# Altium PCB 1_ir-tara-f.PcbDoc (part 7 of 8)
Units mm, origin at the board's own origin, x right, y up, seen from the top; angles counter-clockwise.
Board outline 151 x 86.38 mm, 2 copper layers (Top Layer, Bottom Layer); 728 components, 20 nets, 2100 pads, 0 vias.
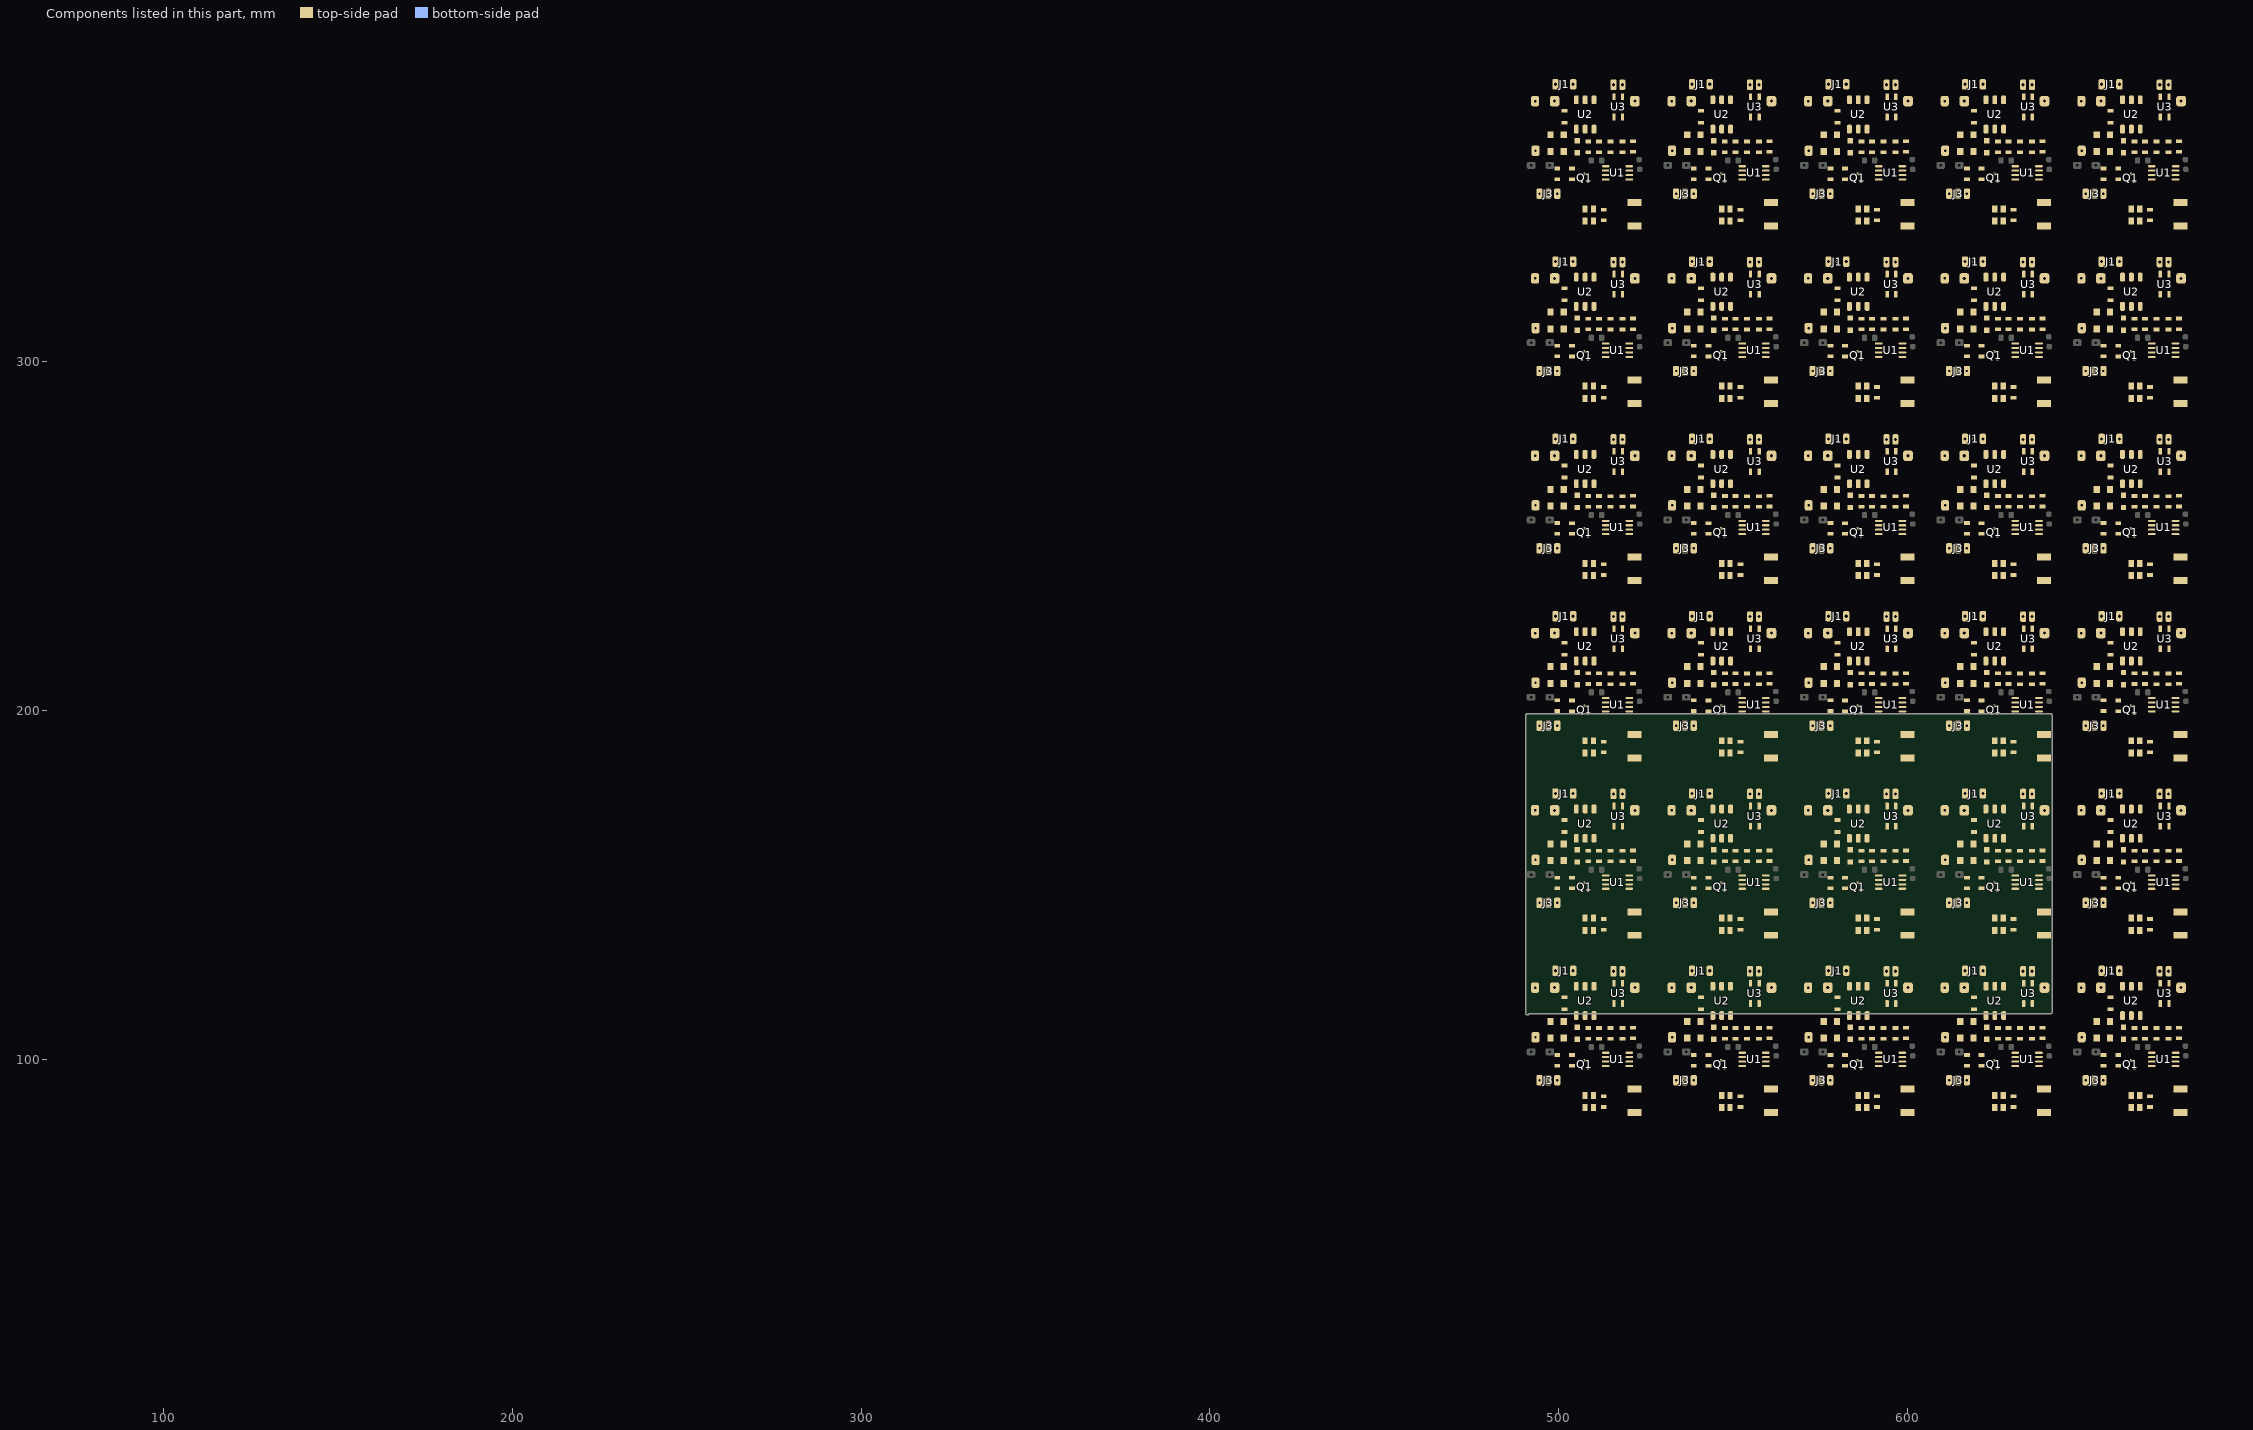
[diagram p7: the components of this part, seen from the top]

## Nets (pads, with @x,y where several pads share a name; then routed paths per layer and width w, separated by ;. In a path a pad name is that pad's centre, name@x,y a point inside that pad or via, vN(x,y) a via of type N, cw(c..) or ccw(c..) an arc to the next point about the centre after c; other vN are vias at no path point) (continued)
copper on no net: (continued)
  Top Layer w1: 492.094,102.173 491.844,102.173 491.344,101.673 491.344,101.099 491.332,101.087 491.332,82.234 492.475,81.091 496.793,81.091 ; 492.094,153.011 491.844,153.011 491.344,152.511 491.344,151.938 491.332,151.926 491.332,133.072 492.475,131.929 496.793,131.929 ; 492.094,203.85 491.844,203.85 491.344,203.35 491.344,202.776 491.332,202.764 491.332,183.911 492.475,182.768 496.793,182.768 ; 492.094,254.689 491.844,254.689 491.344,254.189 491.344,253.615 491.332,253.603 491.332,234.75 492.475,233.607 496.793,233.607 ; 492.094,305.527 491.844,305.527 491.344,305.027 491.344,304.453 491.332,304.441 491.332,285.588 492.475,284.445 496.793,284.445 ; 492.094,356.366 491.844,356.366 491.344,355.866 491.344,355.292 491.332,355.28 491.332,336.427 492.475,335.284 496.793,335.284 ; 494.103,106.146 495.523,106.146 ; 494.103,156.984 495.523,156.984 ; 494.103,207.823 495.523,207.823 ; 494.103,258.662 495.523,258.662 ; 494.103,309.5 495.523,309.5 ; 494.102,360.339 495.523,360.339 ; 494.507,94.299 494.507,96.585 495.523,97.601 495.523,106.146 ; 494.507,145.137 494.507,147.423 495.523,148.439 495.523,156.984 ; 494.507,195.976 494.507,198.262 495.523,199.278 495.523,207.823 ; 494.507,246.815 494.507,249.101 495.523,250.117 495.523,258.662 ; 494.507,297.653 494.507,299.939 495.523,300.955 495.523,309.5 ; 494.507,348.492 494.507,350.778 495.523,351.794 495.523,360.339 ; 497.047,94.045 497.047,81.345 496.793,81.091 ; 497.047,144.883 497.047,132.183 496.793,131.929 ; 497.047,195.722 497.047,183.022 496.793,182.768 ; 497.047,246.561 497.047,233.861 496.793,233.607 ; 497.047,297.399 497.047,284.699 496.793,284.445 ; 497.047,348.238 497.047,335.538 496.793,335.284 ; 497.682,110.946 497.682,113.222 498.825,114.365 501.619,114.365 ; 497.682,161.784 497.682,164.06 498.825,165.203 501.619,165.203 ; 497.682,212.623 497.682,214.899 498.825,216.042 501.619,216.042 ; 497.682,263.462 497.682,265.738 498.825,266.881 501.619,266.881 ; 497.682,314.3 497.682,316.576 498.825,317.719 501.619,317.719 ; 497.682,365.139 497.682,367.415 498.825,368.558 501.619,368.558 ; 498.679,124.92 499.079,125.32 499.079,125.414 ; 498.679,175.759 499.079,176.159 499.079,176.252 ; 498.679,226.597 499.079,226.997 499.079,227.091 ; 498.679,277.436 499.079,277.836 499.079,277.93 ; 498.679,328.274 499.079,328.674 499.079,328.768 ; 498.679,379.113 499.079,379.513 499.079,379.607 ; 498.825,114.492 498.825,120.567 498.846,120.588 ; 498.825,165.33 498.825,171.405 498.846,171.426 ; 498.825,216.169 498.825,222.244 498.846,222.265 ; 498.825,267.008 498.825,273.083 498.846,273.104 ; 498.825,317.846 498.825,323.921 498.846,323.942 ; 498.825,368.685 498.825,374.76 498.846,374.781 ; 499.552,103.605 499.552,101.302 499.577,101.277 499.587,101.277 ; 499.552,103.986 498.082,105.456 498.082,105.646 497.582,106.146 495.523,106.146 ; 499.552,154.444 499.552,152.14 499.577,152.115 499.587,152.115 ; 499.552,154.825 498.082,156.294 498.082,156.484 497.582,156.984 495.523,156.984 ; 499.552,205.282 499.552,202.979 499.577,202.954 499.587,202.954 ; 499.552,205.663 498.082,207.133 498.082,207.323 497.582,207.823 495.523,207.823 ; 499.552,256.121 499.552,253.818 499.577,253.793 499.587,253.793 ; 499.552,256.502 498.082,257.972 498.082,258.162 497.582,258.662 495.523,258.662 ; 499.552,306.959 499.552,304.656 499.577,304.631 499.587,304.631 ; 499.552,307.34 498.082,308.81 498.082,309 497.582,309.5 495.523,309.5 ; 499.552,357.798 499.552,355.495 499.577,355.47 499.587,355.47 ; 499.552,358.179 498.082,359.649 498.082,359.839 497.582,360.339 495.523,360.339 ; 501.982,110.319 503.044,109.257 504.671,109.257 504.794,109.257 ; 501.982,161.157 503.044,160.095 504.671,160.095 504.794,160.095 ; 501.982,211.996 503.044,210.934 504.671,210.934 504.794,210.934 ; 501.982,262.835 503.044,261.773 504.671,261.773 504.794,261.773 ; 501.982,313.673 503.044,312.611 504.671,312.611 504.794,312.611 ; 501.982,364.512 503.044,363.45 504.671,363.45 504.794,363.45 ; 504.921,109.257 504.794,109.257 ; 504.921,160.095 504.794,160.095 ; 504.921,210.934 504.794,210.934 ; 504.921,261.773 504.794,261.773 ; 504.921,312.611 504.794,312.611 ; 504.921,363.45 504.794,363.45 ; 505.519,105.974 507.842,105.974 ; 505.519,156.812 507.842,156.812 ; 505.519,207.651 507.842,207.651 ; 505.519,258.49 507.842,258.49 ; 505.519,309.328 507.842,309.328 ; 505.519,360.167 507.842,360.167 ; 507.461,86.292 509.908,86.292 ; 507.461,137.131 509.908,137.131 ; 507.461,187.969 509.908,187.969 ; 507.461,238.808 509.908,238.808 ; 507.461,289.646 509.908,289.646 ; 507.461,340.485 509.908,340.485 ; 507.588,112.569 507.588,109.023 ; 507.588,163.407 507.588,159.862 ; 507.588,214.246 507.588,210.701 ; 507.588,265.085 507.588,261.539 ; 507.588,315.923 507.588,312.378 ; 507.588,366.762 507.588,363.216 ; 507.969,105.974 507.978,105.983 511.398,105.983 ; 507.969,156.812 507.978,156.821 511.398,156.821 ; 507.969,207.651 507.978,207.66 511.398,207.66 ; 507.969,258.49 507.978,258.499 511.398,258.499 ; 507.969,309.328 507.978,309.337 511.398,309.337 ; 507.969,360.167 507.978,360.176 511.398,360.176 ; 510.094,86.292 512.829,86.292 ; 510.094,137.131 512.829,137.131 ; 510.094,187.969 512.829,187.969 ; 510.094,238.808 512.829,238.808 ; 510.094,289.646 512.829,289.646 ; 510.094,340.485 512.829,340.485 ; 510.755,109.023 508.477,109.023 507.588,109.023 ; 510.755,159.862 508.477,159.862 507.588,159.862 ; 510.755,210.701 508.477,210.701 507.588,210.701 ; 510.755,261.539 508.477,261.539 507.588,261.539 ; 510.755,312.378 508.477,312.378 507.588,312.378 ; 510.755,363.216 508.477,363.216 507.588,363.216 ; 512.922,89.435 513.247,89.435 515.317,91.505 521.685,91.505 525.876,91.505 ; 512.922,140.273 513.247,140.273 515.317,142.343 521.685,142.343 525.876,142.343 ; 512.922,191.112 513.247,191.112 515.317,193.182 521.685,193.182 525.876,193.182 ; 512.922,241.951 513.247,241.951 515.317,244.021 521.685,244.021 525.876,244.021 ; 512.922,292.789 513.247,292.789 515.317,294.859 521.685,294.859 525.876,294.859 ; 512.922,343.628 513.247,343.628 515.317,345.698 521.685,345.698 525.876,345.698 ; 521.304,109.094 523.526,109.094 525.876,106.745 525.876,103.951 ; 521.304,159.933 523.526,159.933 525.876,157.583 525.876,154.789 ; 521.304,210.772 523.526,210.772 525.876,208.422 525.876,205.628 ; 521.304,261.61 523.526,261.61 525.876,259.261 525.876,256.467 ; 521.304,312.449 523.526,312.449 525.876,310.099 525.876,307.305 ; 521.304,363.287 523.526,363.287 525.876,360.938 525.876,358.144 ; 523.082,103.824 525.749,103.824 525.876,103.951 ; 523.082,154.662 525.749,154.662 525.876,154.789 ; 523.082,205.501 525.749,205.501 525.876,205.628 ; 523.082,256.34 525.749,256.34 525.876,256.467 ; 523.082,307.178 525.749,307.178 525.876,307.305 ; 523.082,358.017 525.749,358.017 525.876,358.144 ; 531.248,102.173 530.998,102.173 530.498,101.673 530.498,101.099 530.486,101.087 530.486,82.234 531.629,81.091 535.947,81.091 ; 531.248,153.011 530.998,153.011 530.498,152.511 530.498,151.938 530.486,151.926 530.486,133.072 531.629,131.929 535.947,131.929 ; 531.248,203.85 530.998,203.85 530.498,203.35 530.498,202.776 530.486,202.764 530.486,183.911 531.629,182.768 535.947,182.768 ; 531.248,254.689 530.998,254.689 530.498,254.189 530.498,253.615 530.486,253.603 530.486,234.75 531.629,233.607 535.947,233.607 ; 531.248,305.527 530.998,305.527 530.498,305.027 530.498,304.453 530.486,304.441 530.486,285.588 531.629,284.445 535.947,284.445 ; 531.248,356.366 530.998,356.366 530.498,355.866 530.498,355.292 530.486,355.28 530.486,336.427 531.629,335.284 535.947,335.284 ; 533.257,106.146 534.677,106.146 ; 533.257,156.984 534.677,156.984 ; 533.257,207.823 534.677,207.823 ; 533.257,258.662 534.677,258.662 ; 533.257,309.5 534.677,309.5 ; 533.257,360.339 534.677,360.339 ; 533.661,94.299 533.661,96.585 534.677,97.601 534.677,106.146 ; 533.661,145.137 533.661,147.423 534.677,148.439 534.677,156.984 ; 533.661,195.976 533.661,198.262 534.677,199.278 534.677,207.823 ; 533.661,246.815 533.661,249.101 534.677,250.117 534.677,258.662 ; 533.661,297.653 533.661,299.939 534.677,300.955 534.677,309.5 ; 533.661,348.492 533.661,350.778 534.677,351.794 534.677,360.339 ; 536.201,94.045 536.201,81.345 535.947,81.091 ; 536.201,144.883 536.201,132.183 535.947,131.929 ; 536.201,195.722 536.201,183.022 535.947,182.768 ; 536.201,246.561 536.201,233.861 535.947,233.607 ; 536.201,297.399 536.201,284.699 535.947,284.445 ; 536.201,348.238 536.201,335.538 535.947,335.284 ; 536.836,110.946 536.836,113.222 537.979,114.365 540.773,114.365 ; 536.836,161.784 536.836,164.06 537.979,165.203 540.773,165.203 ; 536.836,212.623 536.836,214.899 537.979,216.042 540.773,216.042 ; 536.836,263.462 536.836,265.738 537.979,266.881 540.773,266.881 ; 536.836,314.3 536.836,316.576 537.979,317.719 540.773,317.719 ; 536.836,365.139 536.836,367.415 537.979,368.558 540.773,368.558 ; 537.833,124.92 538.233,125.32 538.233,125.414 ; 537.833,175.759 538.233,176.159 538.233,176.252 ; 537.833,226.597 538.233,226.997 538.233,227.091 ; 537.833,277.436 538.233,277.836 538.233,277.93 ; 537.833,328.274 538.233,328.674 538.233,328.768 ; 537.833,379.113 538.233,379.513 538.233,379.607 ; 537.979,114.492 537.979,120.567 538,120.588 ; 537.979,165.33 537.979,171.405 538,171.426 ; 537.979,216.169 537.979,222.244 538,222.265 ; 537.979,267.008 537.979,273.083 538,273.104 ; 537.979,317.846 537.979,323.921 538,323.942 ; 537.979,368.685 537.979,374.76 538,374.781 ; 538.706,103.605 538.706,101.302 538.731,101.277 538.741,101.277 ; 538.706,103.986 537.236,105.456 537.236,105.646 536.736,106.146 534.677,106.146 ; 538.706,154.444 538.706,152.14 538.731,152.115 538.741,152.115 ; 538.706,154.825 537.236,156.294 537.236,156.484 536.736,156.984 534.677,156.984 ; 538.706,205.282 538.706,202.979 538.731,202.954 538.741,202.954 ; 538.706,205.663 537.236,207.133 537.236,207.323 536.736,207.823 534.677,207.823 ; 538.706,256.121 538.706,253.818 538.731,253.793 538.741,253.793 ; 538.706,256.502 537.236,257.972 537.236,258.162 536.736,258.662 534.677,258.662 ; 538.706,306.959 538.706,304.656 538.731,304.631 538.741,304.631 ; 538.706,307.34 537.236,308.81 537.236,309 536.736,309.5 534.677,309.5 ; 538.706,357.798 538.706,355.495 538.731,355.47 538.741,355.47 ; 538.706,358.179 537.236,359.649 537.236,359.839 536.736,360.339 534.677,360.339 ; 541.136,110.319 542.198,109.257 543.825,109.257 543.948,109.257 ; 541.136,161.157 542.198,160.095 543.825,160.095 543.948,160.095 ; 541.136,211.996 542.198,210.934 543.825,210.934 543.948,210.934 ; 541.136,262.835 542.198,261.773 543.825,261.773 543.948,261.773 ; 541.136,313.673 542.198,312.611 543.825,312.611 543.948,312.611 ; 541.136,364.512 542.198,363.45 543.825,363.45 543.948,363.45 ; 544.075,109.257 543.948,109.257 ; 544.075,160.095 543.948,160.095 ; 544.075,210.934 543.948,210.934 ; 544.075,261.773 543.948,261.773 ; 544.075,312.611 543.948,312.611 ; 544.075,363.45 543.948,363.45 ; 544.673,105.974 546.996,105.974 ; 544.673,156.812 546.996,156.812 ; 544.673,207.651 546.996,207.651 ; 544.673,258.49 546.996,258.49 ; 544.673,309.328 546.996,309.328 ; 544.673,360.167 546.996,360.167 ; 546.615,86.292 549.062,86.292 ; 546.615,137.131 549.062,137.131 ; 546.615,187.969 549.062,187.969 ; 546.615,238.808 549.062,238.808 ; 546.615,289.646 549.062,289.646 ; 546.615,340.485 549.062,340.485 ; 546.742,112.569 546.742,109.023 ; 546.742,163.407 546.742,159.862 ; 546.742,214.246 546.742,210.701 ; 546.742,265.085 546.742,261.539 ; 546.742,315.923 546.742,312.378 ; 546.742,366.762 546.742,363.216 ; 547.123,105.974 547.133,105.983 550.552,105.983 ; 547.123,156.812 547.133,156.821 550.552,156.821 ; 547.123,207.651 547.133,207.66 550.552,207.66 ; 547.123,258.49 547.133,258.499 550.552,258.499 ; 547.123,309.328 547.133,309.337 550.552,309.337 ; 547.123,360.167 547.133,360.176 550.552,360.176 ; 549.249,86.292 551.983,86.292 ; 549.249,137.131 551.983,137.131 ; 549.249,187.969 551.983,187.969 ; 549.249,238.808 551.983,238.808 ; 549.249,289.646 551.983,289.646 ; 549.249,340.485 551.983,340.485 ; 549.91,109.023 547.631,109.023 546.742,109.023 ; 549.91,159.862 547.631,159.862 546.742,159.862 ; 549.91,210.701 547.631,210.701 546.742,210.701 ; 549.91,261.539 547.631,261.539 546.742,261.539 ; 549.91,312.378 547.631,312.378 546.742,312.378 ; 549.91,363.216 547.631,363.216 546.742,363.216 ; 552.076,89.435 552.401,89.435 554.471,91.505 560.839,91.505 565.03,91.505 ; 552.076,140.273 552.401,140.273 554.471,142.343 560.839,142.343 565.03,142.343 ; 552.076,191.112 552.401,191.112 554.471,193.182 560.839,193.182 565.03,193.182 ; 552.076,241.951 552.401,241.951 554.471,244.021 560.839,244.021 565.03,244.021 ; 552.076,292.789 552.401,292.789 554.471,294.859 560.839,294.859 565.03,294.859 ; 552.076,343.628 552.401,343.628 554.471,345.698 560.839,345.698 565.03,345.698 ; 560.458,109.094 562.681,109.094 565.03,106.745 565.03,103.951 ; 560.458,159.933 562.681,159.933 565.03,157.583 565.03,154.789 ; 560.458,210.772 562.681,210.772 565.03,208.422 565.03,205.628 ; 560.458,261.61 562.681,261.61 565.03,259.261 565.03,256.467 ; 560.458,312.449 562.681,312.449 565.03,310.099 565.03,307.305 ; 560.458,363.287 562.681,363.287 565.03,360.938 565.03,358.144 ; 562.236,103.824 564.903,103.824 565.03,103.951 ; 562.236,154.662 564.903,154.662 565.03,154.789 ; 562.236,205.501 564.903,205.501 565.03,205.628 ; 562.236,256.34 564.903,256.34 565.03,256.467 ; 562.236,307.178 564.903,307.178 565.03,307.305 ; 562.236,358.017 564.903,358.017 565.03,358.144 ; 570.403,102.173 570.153,102.173 569.653,101.673 569.653,101.099 569.641,101.087 569.641,82.234 570.784,81.091 575.102,81.091 ; 570.403,203.85 570.153,203.85 569.653,203.35 569.653,202.776 569.641,202.764 569.641,183.911 570.784,182.768 575.102,182.768 ; 570.403,254.689 570.153,254.689 569.653,254.189 569.653,253.615 569.641,253.603 569.641,234.75 570.784,233.607 575.102,233.607 ; 570.403,305.527 570.153,305.527 569.653,305.027 569.653,304.453 569.641,304.441 569.641,285.588 570.784,284.445 575.102,284.445 ; 570.403,356.366 570.153,356.366 569.653,355.866 569.653,355.292 569.641,355.28 569.641,336.427 570.784,335.284 575.102,335.284 ; 572.412,106.146 573.832,106.146 ; 572.412,207.823 573.832,207.823 ; 572.412,258.662 573.832,258.662 ; 572.412,309.5 573.832,309.5 ; 572.412,360.339 573.832,360.339 ; 572.816,94.299 572.816,96.585 573.832,97.601 573.832,106.146 ; 572.816,195.976 572.816,198.262 573.832,199.278 573.832,207.823 ; 572.816,246.815 572.816,249.101 573.832,250.117 573.832,258.662 ; 572.816,297.653 572.816,299.939 573.832,300.955 573.832,309.5 ; 572.816,348.492 572.816,350.778 573.832,351.794 573.832,360.339 ; 575.356,94.045 575.356,81.345 575.102,81.091 ; 575.356,195.722 575.356,183.022 575.102,182.768 ; 575.356,246.561 575.356,233.861 575.102,233.607 ; 575.356,297.399 575.356,284.699 575.102,284.445 ; 575.356,348.238 575.356,335.538 575.102,335.284 ; 575.991,110.946 575.991,113.222 577.134,114.365 579.928,114.365 ; 575.991,212.623 575.991,214.899 577.134,216.042 579.928,216.042 ; 575.991,263.462 575.991,265.738 577.134,266.881 579.928,266.881 ; 575.991,314.3 575.991,316.576 577.134,317.719 579.928,317.719 ; 575.991,365.139 575.991,367.415 577.134,368.558 579.928,368.558 ; 576.988,124.92 577.388,125.32 577.388,125.414 ; 576.988,226.597 577.388,226.997 577.388,227.091 ; 576.988,277.436 577.388,277.836 577.388,277.93 ; 576.988,328.274 577.388,328.674 577.388,328.768 ; 576.988,379.113 577.388,379.513 577.388,379.607 ; 577.134,114.492 577.134,120.567 577.155,120.588 ; 577.134,216.169 577.134,222.244 577.155,222.265 ; 577.134,267.008 577.134,273.083 577.155,273.104 ; 577.134,317.846 577.134,323.921 577.155,323.942 ; 577.134,368.685 577.134,374.76 577.155,374.781 ; 577.861,103.605 577.861,101.302 577.886,101.277 577.896,101.277 ; 577.861,103.986 576.391,105.456 576.391,105.646 575.891,106.146 573.832,106.146 ; 577.861,205.282 577.861,202.979 577.886,202.954 577.896,202.954 ; 577.861,205.663 576.391,207.133 576.391,207.323 575.891,207.823 573.832,207.823 ; 577.861,256.121 577.861,253.818 577.886,253.793 577.896,253.793 ; 577.861,256.502 576.391,257.972 576.391,258.162 575.891,258.662 573.832,258.662 ; 577.861,306.959 577.861,304.656 577.886,304.631 577.896,304.631 ; 577.861,307.34 576.391,308.81 576.391,309 575.891,309.5 573.832,309.5 ; 577.861,357.798 577.861,355.495 577.886,355.47 577.896,355.47 ; 577.861,358.179 576.391,359.649 576.391,359.839 575.891,360.339 573.832,360.339 ; 580.291,110.319 581.353,109.257 582.98,109.257 583.103,109.257 ; 580.291,211.996 581.353,210.934 582.98,210.934 583.103,210.934 ; 580.291,262.835 581.353,261.773 582.98,261.773 583.103,261.773 ; 580.291,313.673 581.353,312.611 582.98,312.611 583.103,312.611 ; 580.291,364.512 581.353,363.45 582.98,363.45 583.103,363.45 ; 583.23,109.257 583.103,109.257 ; 583.23,210.934 583.103,210.934 ; 583.23,261.773 583.103,261.773 ; 583.23,312.611 583.103,312.611 ; 583.23,363.45 583.103,363.45 ; 583.828,105.974 586.151,105.974 ; 583.828,207.651 586.151,207.651 ; 583.828,258.49 586.151,258.49 ; 583.828,309.328 586.151,309.328 ; 583.828,360.167 586.151,360.167 ; 585.77,86.292 588.217,86.292 ; 585.77,187.969 588.217,187.969 ; 585.77,238.808 588.217,238.808 ; 585.77,289.646 588.217,289.646 ; 585.77,340.485 588.217,340.485 ; 585.897,112.569 585.897,109.023 ; 585.897,214.246 585.897,210.701 ; 585.897,265.085 585.897,261.539 ; 585.897,315.923 585.897,312.378 ; 585.897,366.762 585.897,363.216 ; 586.278,105.974 586.287,105.983 589.707,105.983 ; 586.278,207.651 586.287,207.66 589.707,207.66 ; 586.278,258.49 586.287,258.499 589.707,258.499 ; 586.278,309.328 586.287,309.337 589.707,309.337 ; 586.278,360.167 586.287,360.176 589.707,360.176 ; 588.403,86.292 591.138,86.292 ; 588.403,187.969 591.138,187.969 ; 588.403,238.808 591.138,238.808 ; 588.403,289.646 591.138,289.646 ; 588.403,340.485 591.138,340.485 ; 589.064,109.023 586.786,109.023 585.897,109.023 ; 589.064,210.701 586.786,210.701 585.897,210.701 ; 589.064,261.539 586.786,261.539 585.897,261.539 ; 589.064,312.378 586.786,312.378 585.897,312.378 ; 589.064,363.216 586.786,363.216 585.897,363.216 ; 591.231,89.435 591.556,89.435 593.626,91.505 599.994,91.505 604.185,91.505 ; 591.231,191.112 591.556,191.112 593.626,193.182 599.994,193.182 604.185,193.182 ; 591.231,241.951 591.556,241.951 593.626,244.021 599.994,244.021 604.185,244.021 ; 591.231,292.789 591.556,292.789 593.626,294.859 599.994,294.859 604.185,294.859 ; 591.231,343.628 591.556,343.628 593.626,345.698 599.994,345.698 604.185,345.698 ; 599.613,109.094 601.835,109.094 604.185,106.745 604.185,103.951 ; 599.613,210.772 601.835,210.772 604.185,208.422 604.185,205.628 ; 599.613,261.61 601.835,261.61 604.185,259.261 604.185,256.467 ; 599.613,312.449 601.835,312.449 604.185,310.099 604.185,307.305 ; 599.613,363.287 601.835,363.287 604.185,360.938 604.185,358.144 ; 601.391,103.824 604.058,103.824 604.185,103.951 ; 601.391,205.501 604.058,205.501 604.185,205.628 ; 601.391,256.34 604.058,256.34 604.185,256.467 ; 601.391,307.178 604.058,307.178 604.185,307.305 ; 601.391,358.017 604.058,358.017 604.185,358.144 ; 609.558,102.173 609.308,102.173 608.808,101.673 608.808,101.099 608.796,101.087 608.796,82.234 609.939,81.091 614.257,81.091 ; 609.558,153.011 609.308,153.011 608.808,152.511 608.808,151.938 608.796,151.926 608.796,133.072 609.939,131.929 614.257,131.929 ; 609.558,203.85 609.308,203.85 608.808,203.35 608.808,202.776 608.796,202.764 608.796,183.911 609.939,182.768 614.257,182.768 ; 609.558,254.689 609.308,254.689 608.808,254.189 608.808,253.615 608.796,253.603 608.796,234.75 609.939,233.607 614.257,233.607 ; 609.558,305.527 609.308,305.527 608.808,305.027 608.808,304.453 608.796,304.441 608.796,285.588 609.939,284.445 614.257,284.445 ; 609.558,356.366 609.308,356.366 608.808,355.866 608.808,355.292 608.796,355.28 608.796,336.427 609.939,335.284 614.257,335.284 ; 611.566,106.146 612.987,106.146 ; 611.566,156.984 612.987,156.984 ; 611.566,207.823 612.987,207.823 ; 611.566,258.662 612.987,258.662 ; 611.566,309.5 612.987,309.5 ; 611.566,360.339 612.987,360.339 ; 611.971,94.299 611.971,96.585 612.987,97.601 612.987,106.146 ; 611.971,145.137 611.971,147.423 612.987,148.439 612.987,156.984 ; 611.971,195.976 611.971,198.262 612.987,199.278 612.987,207.823 ; 611.971,246.815 611.971,249.101 612.987,250.117 612.987,258.662 ; 611.971,297.653 611.971,299.939 612.987,300.955 612.987,309.5 ; 611.971,348.492 611.971,350.778 612.987,351.794 612.987,360.339 ; 614.511,94.045 614.511,81.345 614.257,81.091 ; 614.511,144.883 614.511,132.183 614.257,131.929 ; 614.511,195.722 614.511,183.022 614.257,182.768 ; 614.511,246.561 614.511,233.861 614.257,233.607 ; 614.511,297.399 614.511,284.699 614.257,284.445 ; 614.511,348.238 614.511,335.538 614.257,335.284 ; 615.146,110.946 615.146,113.222 616.289,114.365 619.083,114.365 ; 615.146,161.784 615.146,164.06 616.289,165.203 619.083,165.203 ; 615.146,212.623 615.146,214.899 616.289,216.042 619.083,216.042 ; 615.146,263.462 615.146,265.738 616.289,266.881 619.083,266.881 ; 615.146,314.3 615.146,316.576 616.289,317.719 619.083,317.719 ; 615.146,365.139 615.146,367.415 616.289,368.558 619.083,368.558 ; 616.143,124.92 616.543,125.32 616.543,125.414 ; 616.143,175.759 616.543,176.159 616.543,176.252 ; 616.143,226.597 616.543,226.997 616.543,227.091 ; 616.143,277.436 616.543,277.836 616.543,277.93 ; 616.143,328.274 616.543,328.674 616.543,328.768 ; 616.143,379.113 616.543,379.513 616.543,379.607 ; 616.289,114.492 616.289,120.567 616.31,120.588 ; 616.289,165.33 616.289,171.405 616.31,171.426 ; 616.289,216.169 616.289,222.244 616.31,222.265 ; 616.289,267.008 616.289,273.083 616.31,273.104 ; 616.289,317.846 616.289,323.921 616.31,323.942 ; 616.289,368.685 616.289,374.76 616.31,374.781 ; 617.016,103.605 617.016,101.302 617.041,101.277 617.051,101.277 ; 617.016,103.986 615.546,105.456 615.546,105.646 615.046,106.146 612.987,106.146 ; 617.015,154.444 617.015,152.14 617.04,152.115 617.051,152.115 ; 617.015,154.825 615.546,156.294 615.546,156.484 615.046,156.984 612.987,156.984 ; 617.015,205.282 617.015,202.979 617.04,202.954 617.051,202.954 ; 617.015,205.663 615.546,207.133 615.546,207.323 615.046,207.823 612.987,207.823 ; 617.015,256.121 617.015,253.818 617.04,253.793 617.051,253.793 ; 617.015,256.502 615.546,257.972 615.546,258.162 615.046,258.662 612.987,258.662 ; 617.015,306.959 617.015,304.656 617.04,304.631 617.051,304.631 ; 617.015,307.34 615.546,308.81 615.546,309 615.046,309.5 612.987,309.5 ; 617.015,357.798 617.015,355.495 617.04,355.47 617.051,355.47 ; 617.015,358.179 615.546,359.649 615.546,359.839 615.046,360.339 612.987,360.339 ; 619.446,364.512 620.508,363.45 622.135,363.45 622.258,363.45 ; 619.446,110.319 620.508,109.257 622.135,109.257 622.258,109.257 ; 619.446,161.157 620.508,160.095 622.135,160.095 622.258,160.095 ; 619.446,211.996 620.508,210.934 622.135,210.934 622.258,210.934 ; 619.446,262.835 620.508,261.773 622.135,261.773 622.258,261.773 ; 619.446,313.673 620.508,312.611 622.135,312.611 622.258,312.611 ; 622.385,109.257 622.258,109.257 ; 622.385,160.095 622.258,160.095 ; 622.385,210.934 622.258,210.934 ; 622.385,261.773 622.258,261.773 ; 622.385,312.611 622.258,312.611 ; 622.385,363.45 622.258,363.45 ; 622.983,105.974 625.306,105.974 ; 622.983,156.812 625.306,156.812 ; 622.983,207.651 625.306,207.651 ; 622.983,258.49 625.306,258.49 ; 622.983,309.328 625.306,309.328 ; 622.983,360.167 625.306,360.167 ; 624.925,86.292 627.372,86.292 ; 624.925,137.131 627.372,137.131 ; 624.925,187.969 627.372,187.969 ; 624.925,238.808 627.372,238.808 ; 624.925,289.646 627.372,289.646 ; 624.925,340.485 627.372,340.485 ; 625.052,112.569 625.052,109.023 ; 625.052,163.407 625.052,159.862 ; 625.052,214.246 625.052,210.701 ; 625.052,265.085 625.052,261.539 ; 625.052,315.923 625.052,312.378 ; 625.052,366.762 625.052,363.216 ; 625.433,105.974 625.442,105.983 628.862,105.983 ; 625.433,156.812 625.442,156.821 628.862,156.821 ; 625.433,207.651 625.442,207.66 628.862,207.66 ; 625.433,258.49 625.442,258.499 628.862,258.499 ; 625.433,309.328 625.442,309.337 628.862,309.337 ; 625.433,360.167 625.442,360.176 628.862,360.176 ; 627.558,86.292 630.293,86.292 ; 627.558,137.131 630.293,137.131 ; 627.558,187.969 630.293,187.969 ; 627.558,238.808 630.293,238.808 ; 627.558,289.646 630.293,289.646 ; 627.558,340.485 630.293,340.485 ; 628.219,109.023 625.941,109.023 625.052,109.023 ; 628.219,159.862 625.941,159.862 625.052,159.862 ; 628.219,210.701 625.941,210.701 625.052,210.701 ; 628.219,261.539 625.941,261.539 625.052,261.539 ; 628.219,312.378 625.941,312.378 625.052,312.378 ; 628.219,363.216 625.941,363.216 625.052,363.216 ; 630.386,89.435 630.711,89.435 632.781,91.505 639.149,91.505 643.34,91.505 ; 630.386,140.273 630.711,140.273 632.781,142.343 639.149,142.343 643.34,142.343 ; 630.386,191.112 630.711,191.112 632.781,193.182 639.149,193.182 643.34,193.182 ; 630.386,241.951 630.711,241.951 632.781,244.021 639.149,244.021 643.34,244.021 ; 630.386,292.789 630.711,292.789 632.781,294.859 639.149,294.859 643.34,294.859 ; 630.386,343.628 630.711,343.628 632.781,345.698 639.149,345.698 643.34,345.698 ; 638.768,109.094 640.99,109.094 643.34,106.745 643.34,103.951 ; 638.768,159.933 640.99,159.933 643.34,157.583 643.34,154.789 ; 638.768,210.772 640.99,210.772 643.34,208.422 643.34,205.628 ; 638.768,261.61 640.99,261.61 643.34,259.261 643.34,256.467 ; 638.768,312.449 640.99,312.449 643.34,310.099 643.34,307.305 ; 638.768,363.287 640.99,363.287 643.34,360.938 643.34,358.144 ; 640.546,103.824 643.213,103.824 643.34,103.951 ; 640.546,154.662 643.213,154.662 643.34,154.789 ; 640.546,205.501 643.213,205.501 643.34,205.628 ; 640.546,256.34 643.213,256.34 643.34,256.467 ; 640.546,307.178 643.213,307.178 643.34,307.305 ; 640.546,358.017 643.213,358.017 643.34,358.144 ; 648.712,102.173 648.462,102.173 647.962,101.673 647.962,101.099 647.95,101.087 647.95,82.234 649.093,81.091 653.411,81.091 ; 648.712,153.011 648.462,153.011 647.962,152.511 647.962,151.938 647.95,151.926 647.95,133.072 649.093,131.929 653.411,131.929 ; 648.712,203.85 648.462,203.85 647.962,203.35 647.962,202.776 647.95,202.764 647.95,183.911 649.093,182.768 653.411,182.768 ; 648.712,254.689 648.462,254.689 647.962,254.189 647.962,253.615 647.95,253.603 647.95,234.75 649.093,233.607 653.411,233.607 ; 648.712,305.527 648.462,305.527 647.962,305.027 647.962,304.453 647.95,304.441 647.95,285.588 649.093,284.445 653.411,284.445 ; 648.712,356.366 648.462,356.366 647.962,355.866 647.962,355.292 647.95,355.28 647.95,336.427 649.093,335.284 653.411,335.284 ; 650.721,106.146 652.141,106.146 ; 650.721,156.984 652.141,156.984 ; 650.721,207.823 652.141,207.823 ; 650.721,258.662 652.141,258.662 ; 650.721,309.5 652.141,309.5 ; 650.721,360.339 652.141,360.339 ; 651.125,94.299 651.125,96.585 652.141,97.601 652.141,106.146 ; 651.125,145.137 651.125,147.423 652.141,148.439 652.141,156.984 ; 651.125,195.976 651.125,198.262 652.141,199.278 652.141,207.823 ; 651.125,246.815 651.125,249.101 652.141,250.117 652.141,258.662 ; 651.125,297.653 651.125,299.939 652.141,300.955 652.141,309.5 ; 651.125,348.492 651.125,350.778 652.141,351.794 652.141,360.339 ; 653.665,94.045 653.665,81.345 653.411,81.091 ; 653.665,144.883 653.665,132.183 653.411,131.929 ; 653.665,195.722 653.665,183.022 653.411,182.768 ; 653.665,246.561 653.665,233.861 653.411,233.607 ; 653.665,297.399 653.665,284.699 653.411,284.445 ; 653.665,348.238 653.665,335.538 653.411,335.284 ; 654.3,110.946 654.3,113.222 655.443,114.365 658.237,114.365 ; 654.3,161.784 654.3,164.06 655.443,165.203 658.237,165.203 ; 654.3,212.623 654.3,214.899 655.443,216.042 658.237,216.042 ; 654.3,263.462 654.3,265.738 655.443,266.881 658.237,266.881 ; 654.3,314.3 654.3,316.576 655.443,317.719 658.237,317.719 ; 654.3,365.139 654.3,367.415 655.443,368.558 658.237,368.558 ; 655.297,124.92 655.697,125.32 655.697,125.414 ; 655.297,175.759 655.697,176.159 655.697,176.252 ; 655.297,226.597 655.697,226.997 655.697,227.091 ; 655.297,277.436 655.697,277.836 655.697,277.93 ; 655.297,328.274 655.697,328.674 655.697,328.768 ; 655.297,379.113 655.697,379.513 655.697,379.607 ; 655.443,114.492 655.443,120.567 655.464,120.588 ; 655.443,165.33 655.443,171.405 655.464,171.426 ; 655.443,216.169 655.443,222.244 655.464,222.265 ; 655.443,267.008 655.443,273.083 655.464,273.104 ; 655.443,317.846 655.443,323.921 655.464,323.942 ; 655.443,368.685 655.443,374.76 655.464,374.781 ; 656.17,103.605 656.17,101.302 656.195,101.277 656.205,101.277 ; 656.17,103.986 654.7,105.456 654.7,105.646 654.2,106.146 652.141,106.146 ; 656.17,154.444 656.17,152.14 656.195,152.115 656.205,152.115 ; 656.17,154.825 654.7,156.294 654.7,156.484 654.2,156.984 652.141,156.984 ; 656.17,205.282 656.17,202.979 656.195,202.954 656.205,202.954 ; 656.17,205.663 654.7,207.133 654.7,207.323 654.2,207.823 652.141,207.823 ; 656.17,256.121 656.17,253.818 656.195,253.793 656.205,253.793 ; 656.17,256.502 654.7,257.972 654.7,258.162 654.2,258.662 652.141,258.662 ; 656.17,306.959 656.17,304.656 656.195,304.631 656.205,304.631 ; 656.17,307.34 654.7,308.81 654.7,309 654.2,309.5 652.141,309.5 ; 656.17,357.798 656.17,355.495 656.195,355.47 656.205,355.47 ; 656.17,358.179 654.7,359.649 654.7,359.839 654.2,360.339 652.141,360.339 ; 658.6,110.319 659.662,109.257 661.289,109.257 661.412,109.257 ; 658.6,161.157 659.662,160.095 661.289,160.095 661.412,160.095 ; 658.6,211.996 659.662,210.934 661.289,210.934 661.412,210.934 ; 658.6,262.835 659.662,261.773 661.289,261.773 661.412,261.773 ; 658.6,313.673 659.662,312.611 661.289,312.611 661.412,312.611 ; 658.6,364.512 659.662,363.45 661.289,363.45 661.412,363.45 ; 661.539,109.257 661.412,109.257 ; 661.539,160.095 661.412,160.095 ; 661.539,210.934 661.412,210.934 ; 661.539,261.773 661.412,261.773 ; 661.539,312.611 661.412,312.611 ; 661.539,363.45 661.412,363.45 ; 662.137,105.974 664.46,105.974 ; 662.137,156.812 664.46,156.812 ; 662.137,207.651 664.46,207.651 ; 662.137,258.49 664.46,258.49 ; 662.137,309.328 664.46,309.328 ; 662.137,360.167 664.46,360.167 ; 664.079,86.292 666.526,86.292 ; 664.079,137.131 666.526,137.131 ; 664.079,187.969 666.526,187.969 ; 664.079,238.808 666.526,238.808 ; 664.079,289.646 666.526,289.646 ; 664.079,340.485 666.526,340.485 ; 664.206,112.569 664.206,109.023 ; 664.206,163.407 664.206,159.862 ; 664.206,214.246 664.206,210.701 ; 664.206,265.085 664.206,261.539 ; 664.206,315.923 664.206,312.378 ; 664.206,366.762 664.206,363.216 ; 664.587,105.974 664.596,105.983 668.016,105.983 ; 664.587,156.812 664.596,156.821 668.016,156.821 ; 664.587,207.651 664.596,207.66 668.016,207.66 ; 664.587,258.49 664.596,258.499 668.016,258.499 ; 664.587,309.328 664.596,309.337 668.016,309.337 ; 664.587,360.167 664.596,360.176 668.016,360.176 ; 666.712,86.292 669.447,86.292 ; 666.712,137.131 669.447,137.131 ; 666.712,187.969 669.447,187.969 ; 666.712,238.808 669.447,238.808 ; 666.712,289.646 669.447,289.646 ; 666.712,340.485 669.447,340.485 ; 667.374,109.023 665.095,109.023 664.206,109.023 ; 667.374,159.862 665.095,159.862 664.206,159.862 ; 667.374,210.701 665.095,210.701 664.206,210.701 ; 667.374,261.539 665.095,261.539 664.206,261.539 ; 667.374,312.378 665.095,312.378 664.206,312.378 ; 667.374,363.216 665.095,363.216 664.206,363.216 ; 669.54,89.435 669.865,89.435 671.935,91.505 678.303,91.505 682.494,91.505 ; 669.54,140.273 669.865,140.273 671.935,142.343 678.303,142.343 682.494,142.343 ; 669.54,191.112 669.865,191.112 671.935,193.182 678.303,193.182 682.494,193.182 ; 669.54,241.951 669.865,241.951 671.935,244.021 678.303,244.021 682.494,244.021 ; 669.54,292.789 669.865,292.789 671.935,294.859 678.303,294.859 682.494,294.859 ; 669.54,343.628 669.865,343.628 671.935,345.698 678.303,345.698 682.494,345.698 ; 677.922,109.094 680.145,109.094 682.494,106.745 682.494,103.951 ; 677.922,159.933 680.145,159.933 682.494,157.583 682.494,154.789 ; 677.922,210.772 680.145,210.772 682.494,208.422 682.494,205.628 ; 677.922,261.61 680.145,261.61 682.494,259.261 682.494,256.467 ; 677.922,312.449 680.145,312.449 682.494,310.099 682.494,307.305 ; 677.922,363.287 680.145,363.287 682.494,360.938 682.494,358.144 ; 679.7,103.824 682.367,103.824 682.494,103.951 ; 679.7,154.662 682.367,154.662 682.494,154.789 ; 679.7,205.501 682.367,205.501 682.494,205.628 ; 679.7,256.34 682.367,256.34 682.494,256.467 ; 679.7,307.178 682.367,307.178 682.494,307.305 ; 679.7,358.017 682.367,358.017 682.494,358.144 ; 496.793,81.091 524.86,81.091 525.876,82.107 525.876,91.505 ; 496.793,131.929 524.86,131.929 525.876,132.945 525.876,142.343 ; 496.793,182.768 524.86,182.768 525.876,183.784 525.876,193.182 ; 496.793,233.607 524.86,233.607 525.876,234.623 525.876,244.021 ; 496.793,284.445 524.86,284.445 525.876,285.461 525.876,294.859 ; 496.793,335.284 524.86,335.284 525.876,336.3 525.876,345.698 ; 504.794,109.257 505.027,109.023 507.588,109.023 ; 504.794,160.095 505.027,159.862 507.588,159.862 ; 504.794,210.934 505.027,210.701 507.588,210.701 ; 504.794,261.773 505.027,261.539 507.588,261.539 ; 504.794,312.611 505.027,312.378 507.588,312.378 ; 504.794,363.45 505.027,363.216 507.588,363.216 ; 525.876,91.505 525.876,103.951 ; 525.876,142.343 525.876,154.789 ; 525.876,193.182 525.876,205.628 ; 525.876,244.021 525.876,256.467 ; 525.876,294.859 525.876,307.305 ; 525.876,345.698 525.876,358.144 ; 535.947,81.091 564.014,81.091 565.03,82.107 565.03,91.505 ; 535.947,131.929 564.014,131.929 565.03,132.945 565.03,142.343 ; 535.947,182.768 564.014,182.768 565.03,183.784 565.03,193.182 ; 535.947,233.607 564.014,233.607 565.03,234.623 565.03,244.021 ; 535.947,284.445 564.014,284.445 565.03,285.461 565.03,294.859 ; 535.947,335.284 564.014,335.284 565.03,336.3 565.03,345.698 ; 543.948,109.257 544.182,109.023 546.742,109.023 ; 543.948,160.095 544.182,159.862 546.742,159.862 ; 543.948,210.934 544.182,210.701 546.742,210.701 ; 543.948,261.773 544.182,261.539 546.742,261.539 ; 543.948,312.611 544.182,312.378 546.742,312.378 ; 543.948,363.45 544.182,363.216 546.742,363.216 ; 565.03,91.505 565.03,103.951 ; 565.03,142.343 565.03,154.789 ; 565.03,193.182 565.03,205.628 ; 565.03,244.021 565.03,256.467 ; 565.03,294.859 565.03,307.305 ; 565.03,345.698 565.03,358.144 ; 575.102,81.091 603.169,81.091 604.185,82.107 604.185,91.505 ; 575.102,182.768 603.169,182.768 604.185,183.784 604.185,193.182 ; 575.102,233.607 603.169,233.607 604.185,234.623 604.185,244.021 ; 575.102,284.445 603.169,284.445 604.185,285.461 604.185,294.859 ; 575.102,335.284 603.169,335.284 604.185,336.3 604.185,345.698 ; 583.103,109.257 583.336,109.023 585.897,109.023 ; 583.103,210.934 583.336,210.701 585.897,210.701 ; 583.103,261.773 583.336,261.539 585.897,261.539 ; 583.103,312.611 583.336,312.378 585.897,312.378 ; 583.103,363.45 583.336,363.216 585.897,363.216 ; 604.185,91.505 604.185,103.951 ; 604.185,193.182 604.185,205.628 ; 604.185,244.021 604.185,256.467 ; 604.185,294.859 604.185,307.305 ; 604.185,345.698 604.185,358.144 ; 614.257,81.091 642.324,81.091 643.34,82.107 643.34,91.505 ; 614.257,131.929 642.324,131.929 643.34,132.945 643.34,142.343 ; 614.257,182.768 642.324,182.768 643.34,183.784 643.34,193.182 ; 614.257,233.607 642.324,233.607 643.34,234.623 643.34,244.021 ; 614.257,284.445 642.324,284.445 643.34,285.461 643.34,294.859 ; 614.257,335.284 642.324,335.284 643.34,336.3 643.34,345.698 ; 622.258,109.257 622.491,109.023 625.052,109.023 ; 622.258,160.095 622.491,159.862 625.052,159.862 ; 622.258,210.934 622.491,210.701 625.052,210.701 ; 622.258,261.773 622.491,261.539 625.052,261.539 ; 622.258,312.611 622.491,312.378 625.052,312.378 ; 622.258,363.45 622.491,363.216 625.052,363.216 ; 643.34,91.505 643.34,103.951 ; 643.34,142.343 643.34,154.789 ; 643.34,193.182 643.34,205.628 ; 643.34,244.021 643.34,256.467 ; 643.34,294.859 643.34,307.305 ; 643.34,345.698 643.34,358.144 ; 653.411,81.091 681.478,81.091 682.494,82.107 682.494,91.505 ; 653.411,131.929 681.478,131.929 682.494,132.945 682.494,142.343 ; 653.411,182.768 681.478,182.768 682.494,183.784 682.494,193.182 ; 653.411,233.607 681.478,233.607 682.494,234.623 682.494,244.021 ; 653.411,284.445 681.478,284.445 682.494,285.461 682.494,294.859 ; 653.411,335.284 681.478,335.284 682.494,336.3 682.494,345.698 ; 661.412,109.257 661.646,109.023 664.206,109.023 ; 661.412,160.095 661.646,159.862 664.206,159.862 ; 661.412,210.934 661.646,210.701 664.206,210.701 ; 661.412,261.773 661.646,261.539 664.206,261.539 ; 661.412,312.611 661.646,312.378 664.206,312.378 ; 661.412,363.45 661.646,363.216 664.206,363.216 ; 682.494,91.505 682.494,103.951 ; 682.494,142.343 682.494,154.789 ; 682.494,193.182 682.494,205.628 ; 682.494,244.021 682.494,256.467 ; 682.494,294.859 682.494,307.305 ; 682.494,345.698 682.494,358.144
  Top Layer w1.5: 493.237,120.588 493.237,123.636 494.521,124.92 498.679,124.92 ; 493.237,171.426 493.237,174.474 494.521,175.759 498.679,175.759 ; 493.237,222.265 493.237,225.313 494.521,226.597 498.679,226.597 ; 493.237,273.104 493.237,276.152 494.521,277.436 498.679,277.436 ; 493.237,323.942 493.237,326.99 494.521,328.274 498.679,328.274 ; 493.237,374.781 493.237,377.829 494.521,379.113 498.679,379.113 ; 532.391,120.588 532.391,123.636 533.676,124.92 537.833,124.92 ; 532.391,171.426 532.391,174.474 533.676,175.759 537.833,175.759 ; 532.391,222.265 532.391,225.313 533.676,226.597 537.833,226.597 ; 532.391,273.104 532.391,276.152 533.676,277.436 537.833,277.436 ; 532.391,323.942 532.391,326.99 533.676,328.274 537.833,328.274 ; 532.391,374.781 532.391,377.829 533.676,379.113 537.833,379.113 ; 571.546,120.588 571.546,123.636 572.83,124.92 576.988,124.92 ; 571.546,222.265 571.546,225.313 572.83,226.597 576.988,226.597 ; 571.546,273.104 571.546,276.152 572.83,277.436 576.988,277.436 ; 571.546,323.942 571.546,326.99 572.83,328.274 576.988,328.274 ; 571.546,374.781 571.546,377.829 572.83,379.113 576.988,379.113 ; 610.701,120.588 610.701,123.636 611.985,124.92 616.143,124.92 ; 610.701,171.426 610.701,174.474 611.985,175.759 616.143,175.759 ; 610.701,222.265 610.701,225.313 611.985,226.597 616.143,226.597 ; 610.701,273.104 610.701,276.152 611.985,277.436 616.143,277.436 ; 610.701,323.942 610.701,326.99 611.985,328.274 616.143,328.274 ; 610.701,374.781 610.701,377.829 611.985,379.113 616.143,379.113 ; 649.855,120.588 649.855,123.636 651.139,124.92 655.297,124.92 ; 649.855,171.426 649.855,174.474 651.139,175.759 655.297,175.759 ; 649.855,222.265 649.855,225.313 651.139,226.597 655.297,226.597 ; 649.855,273.104 649.855,276.152 651.139,277.436 655.297,277.436 ; 649.855,323.942 649.855,326.99 651.139,328.274 655.297,328.274 ; 649.855,374.781 649.855,377.829 651.139,379.113 655.297,379.113

## Polygon pours and split planes (outlines as drawn)
no net on Top Layer "GND_L01_P026" (solid, remove dead copper, pour order 26): 569.133,336.681 570.784,335.03 570.784,334.776 603.423,334.776 604.566,335.919 604.566,360.938 602.026,363.478 599.359,363.478 599.486,363.351 599.486,362.081 598.597,361.192 598.216,361.573 571.165,361.573 569.133,359.541 569.133,355.985
no net on Top Layer "GND_L01_P026" (solid, remove dead copper, pour order 26): 608.288,336.681 609.939,335.03 609.939,334.776 642.578,334.776 643.721,335.919 643.721,360.938 641.181,363.478 638.514,363.478 638.641,363.351 638.641,362.081 637.752,361.192 637.371,361.573 610.32,361.573 608.288,359.541 608.288,355.985
no net on Top Layer "GND_L01_P026" (solid, remove dead copper, pour order 26): 529.978,336.681 531.629,335.03 531.629,334.776 564.268,334.776 565.411,335.919 565.411,360.938 562.871,363.478 560.204,363.478 560.331,363.351 560.331,362.081 559.442,361.192 559.061,361.573 532.01,361.573 529.978,359.541 529.978,355.985
no net on Top Layer "GND_L01_P026" (solid, remove dead copper, pour order 26): 490.824,336.681 492.475,335.03 492.475,334.776 525.114,334.776 526.257,335.919 526.257,360.938 523.717,363.478 521.05,363.478 521.177,363.351 521.177,362.081 520.288,361.192 519.907,361.573 492.856,361.573 490.824,359.541 490.824,355.985
no net on Top Layer "GND_L01_P026" (solid, remove dead copper, pour order 26): 647.442,336.681 649.093,335.03 649.093,334.776 681.732,334.776 682.875,335.919 682.875,360.938 680.335,363.478 677.668,363.478 677.795,363.351 677.795,362.081 676.906,361.192 676.525,361.573 649.474,361.573 647.442,359.541 647.442,355.985
no net on Top Layer "GND_L01_P026" (solid, remove dead copper, pour order 26): 569.133,285.842 570.784,284.191 570.784,283.937 603.423,283.937 604.566,285.08 604.566,310.099 602.026,312.639 599.359,312.639 599.486,312.512 599.486,311.242 598.597,310.353 598.216,310.734 571.165,310.734 569.133,308.702 569.133,305.146
no net on Top Layer "GND_L01_P026" (solid, remove dead copper, pour order 26): 608.288,285.842 609.939,284.191 609.939,283.937 642.578,283.937 643.721,285.08 643.721,310.099 641.181,312.639 638.514,312.639 638.641,312.512 638.641,311.242 637.752,310.353 637.371,310.734 610.32,310.734 608.288,308.702 608.288,305.146
no net on Top Layer "GND_L01_P026" (solid, remove dead copper, pour order 26): 529.978,285.842 531.629,284.191 531.629,283.937 564.268,283.937 565.411,285.08 565.411,310.099 562.871,312.639 560.204,312.639 560.331,312.512 560.331,311.242 559.442,310.353 559.061,310.734 532.01,310.734 529.978,308.702 529.978,305.146
no net on Top Layer "GND_L01_P026" (solid, remove dead copper, pour order 26): 490.824,285.842 492.475,284.191 492.475,283.937 525.114,283.937 526.257,285.08 526.257,310.099 523.717,312.639 521.05,312.639 521.177,312.512 521.177,311.242 520.288,310.353 519.907,310.734 492.856,310.734 490.824,308.702 490.824,305.146
no net on Top Layer "GND_L01_P026" (solid, remove dead copper, pour order 26): 647.442,285.842 649.093,284.191 649.093,283.937 681.732,283.937 682.875,285.08 682.875,310.099 680.335,312.639 677.668,312.639 677.795,312.512 677.795,311.242 676.906,310.353 676.525,310.734 649.474,310.734 647.442,308.702 647.442,305.146
no net on Top Layer "GND_L01_P026" (solid, remove dead copper, pour order 26): 569.133,235.004 570.784,233.353 570.784,233.099 603.423,233.099 604.566,234.242 604.566,259.261 602.026,261.801 599.359,261.801 599.486,261.674 599.486,260.404 598.597,259.515 598.216,259.896 571.165,259.896 569.133,257.864 569.133,254.308
no net on Top Layer "GND_L01_P026" (solid, remove dead copper, pour order 26): 608.288,235.004 609.939,233.353 609.939,233.099 642.578,233.099 643.721,234.242 643.721,259.261 641.181,261.801 638.514,261.801 638.641,261.674 638.641,260.404 637.752,259.515 637.371,259.896 610.32,259.896 608.288,257.864 608.288,254.308
no net on Top Layer "GND_L01_P026" (solid, remove dead copper, pour order 26): 529.978,235.004 531.629,233.353 531.629,233.099 564.268,233.099 565.411,234.242 565.411,259.261 562.871,261.801 560.204,261.801 560.331,261.674 560.331,260.404 559.442,259.515 559.061,259.896 532.01,259.896 529.978,257.864 529.978,254.308
no net on Top Layer "GND_L01_P026" (solid, remove dead copper, pour order 26): 490.824,235.004 492.475,233.353 492.475,233.099 525.114,233.099 526.257,234.242 526.257,259.261 523.717,261.801 521.05,261.801 521.177,261.674 521.177,260.404 520.288,259.515 519.907,259.896 492.856,259.896 490.824,257.864 490.824,254.308
no net on Top Layer "GND_L01_P026" (solid, remove dead copper, pour order 26): 647.442,235.004 649.093,233.353 649.093,233.099 681.732,233.099 682.875,234.242 682.875,259.261 680.335,261.801 677.668,261.801 677.795,261.674 677.795,260.404 676.906,259.515 676.525,259.896 649.474,259.896 647.442,257.864 647.442,254.308
no net on Top Layer "GND_L01_P026" (solid, remove dead copper, pour order 26): 569.133,82.488 570.784,80.837 570.784,80.583 603.423,80.583 604.566,81.726 604.566,106.745 602.026,109.285 599.359,109.285 599.486,109.158 599.486,107.888 598.597,106.999 598.216,107.38 571.165,107.38 569.133,105.348 569.133,101.792
no net on Top Layer "GND_L01_P026" (solid, remove dead copper, pour order 26): 608.288,82.488 609.939,80.837 609.939,80.583 642.578,80.583 643.721,81.726 643.721,106.745 641.181,109.285 638.514,109.285 638.641,109.158 638.641,107.888 637.752,106.999 637.371,107.38 610.32,107.38 608.288,105.348 608.288,101.792
no net on Top Layer "GND_L01_P026" (solid, remove dead copper, pour order 26): 529.978,82.488 531.629,80.837 531.629,80.583 564.268,80.583 565.411,81.726 565.411,106.745 562.871,109.285 560.204,109.285 560.331,109.158 560.331,107.888 559.442,106.999 559.061,107.38 532.01,107.38 529.978,105.348 529.978,101.792
no net on Top Layer "GND_L01_P026" (solid, remove dead copper, pour order 26): 490.824,82.488 492.475,80.837 492.475,80.583 525.114,80.583 526.257,81.726 526.257,106.745 523.717,109.285 521.05,109.285 521.177,109.158 521.177,107.888 520.288,106.999 519.907,107.38 492.856,107.38 490.824,105.348 490.824,101.792
no net on Top Layer "GND_L01_P026" (solid, remove dead copper, pour order 26): 647.442,82.488 649.093,80.837 649.093,80.583 681.732,80.583 682.875,81.726 682.875,106.745 680.335,109.285 677.668,109.285 677.795,109.158 677.795,107.888 676.906,106.999 676.525,107.38 649.474,107.38 647.442,105.348 647.442,101.792
no net on Top Layer "GND_L01_P026" (solid, remove dead copper, pour order 26): 569.133,184.165 570.784,182.514 570.784,182.26 603.423,182.26 604.566,183.403 604.566,208.422 602.026,210.962 599.359,210.962 599.486,210.835 599.486,209.565 598.597,208.676 598.216,209.057 571.165,209.057 569.133,207.025 569.133,203.469
no net on Top Layer "GND_L01_P026" (solid, remove dead copper, pour order 26): 608.288,184.165 609.939,182.514 609.939,182.26 642.578,182.26 643.721,183.403 643.721,208.422 641.181,210.962 638.514,210.962 638.641,210.835 638.641,209.565 637.752,208.676 637.371,209.057 610.32,209.057 608.288,207.025 608.288,203.469
no net on Top Layer "GND_L01_P026" (solid, remove dead copper, pour order 26): 529.978,184.165 531.629,182.514 531.629,182.26 564.268,182.26 565.411,183.403 565.411,208.422 562.871,210.962 560.204,210.962 560.331,210.835 560.331,209.565 559.442,208.676 559.061,209.057 532.01,209.057 529.978,207.025 529.978,203.469
no net on Top Layer "GND_L01_P026" (solid, remove dead copper, pour order 26): 490.824,184.165 492.475,182.514 492.475,182.26 525.114,182.26 526.257,183.403 526.257,208.422 523.717,210.962 521.05,210.962 521.177,210.835 521.177,209.565 520.288,208.676 519.907,209.057 492.856,209.057 490.824,207.025 490.824,203.469
no net on Top Layer "GND_L01_P026" (solid, remove dead copper, pour order 26): 647.442,184.165 649.093,182.514 649.093,182.26 681.732,182.26 682.875,183.403 682.875,208.422 680.335,210.962 677.668,210.962 677.795,210.835 677.795,209.565 676.906,208.676 676.525,209.057 649.474,209.057 647.442,207.025 647.442,203.469
no net on Top Layer "GND_L01_P026" (solid, remove dead copper, pour order 26): 647.442,133.326 649.093,131.675 649.093,131.421 681.732,131.421 682.875,132.564 682.875,157.583 680.335,160.123 677.668,160.123 677.795,159.996 677.795,158.726 676.906,157.837 676.525,158.218 649.474,158.218 647.442,156.186 647.442,152.63
no net on Top Layer "GND_L01_P026" (solid, remove dead copper, pour order 26): 490.824,133.326 492.475,131.675 492.475,131.421 525.114,131.421 526.257,132.564 526.257,157.583 523.717,160.123 521.05,160.123 521.177,159.996 521.177,158.726 520.288,157.837 519.907,158.218 492.856,158.218 490.824,156.186 490.824,152.63
no net on Top Layer "GND_L01_P026" (solid, remove dead copper, pour order 26): 529.978,133.326 531.629,131.675 531.629,131.421 564.268,131.421 565.411,132.564 565.411,157.583 562.871,160.123 560.204,160.123 560.331,159.996 560.331,158.726 559.442,157.837 559.061,158.218 532.01,158.218 529.978,156.186 529.978,152.63
no net on Top Layer "GND_L01_P026" (solid, remove dead copper, pour order 26): 608.288,133.326 609.939,131.675 609.939,131.421 642.578,131.421 643.721,132.564 643.721,157.583 641.181,160.123 638.514,160.123 638.641,159.996 638.641,158.726 637.752,157.837 637.371,158.218 610.32,158.218 608.288,156.186 608.288,152.63
GND on Top Layer "GND_L01_P026" (solid, remove dead copper, pour order 26): 569.133,133.326 570.784,131.675 570.784,131.421 603.423,131.421 604.566,132.564 604.566,157.583 602.026,160.123 599.359,160.123 599.486,159.996 599.486,158.726 598.597,157.837 598.216,158.218 571.165,158.218 569.133,156.186 569.133,152.63
GND on Top Layer "NONET_L01_P024" (hatched 90Degree grid 0.5 track 0.2, shelved, pour order 24): 75.946,71.374 115.697,71.374 115.57,71.247 115.57,9.779 76.073,9.779